# Altium PCB PCB_AltiumDesigner.PcbDoc
Units mm, origin at the board's own origin, x right, y up, seen from the top; angles counter-clockwise.
Board outline 100.7 x 50.7 mm, 2 copper layers (Top Layer, Bottom Layer); 18 components, 17 nets, 66 pads, 14 vias.
Unrouted connection lines stored in the file: 1.
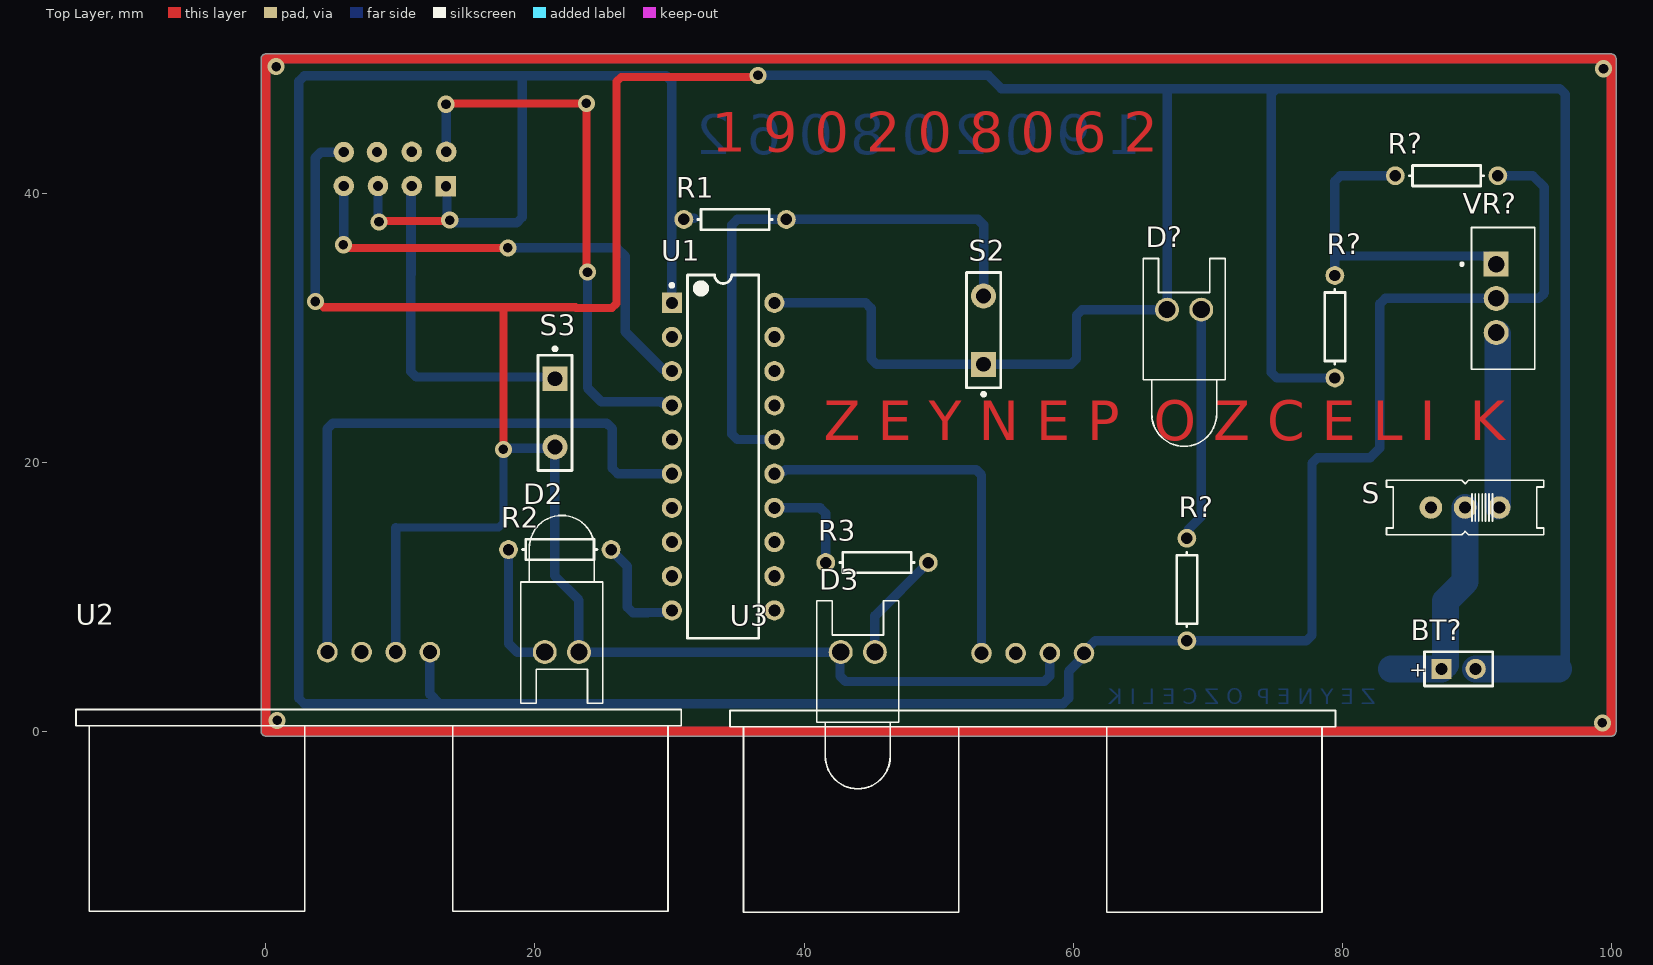
[diagram p0: Top Layer view]
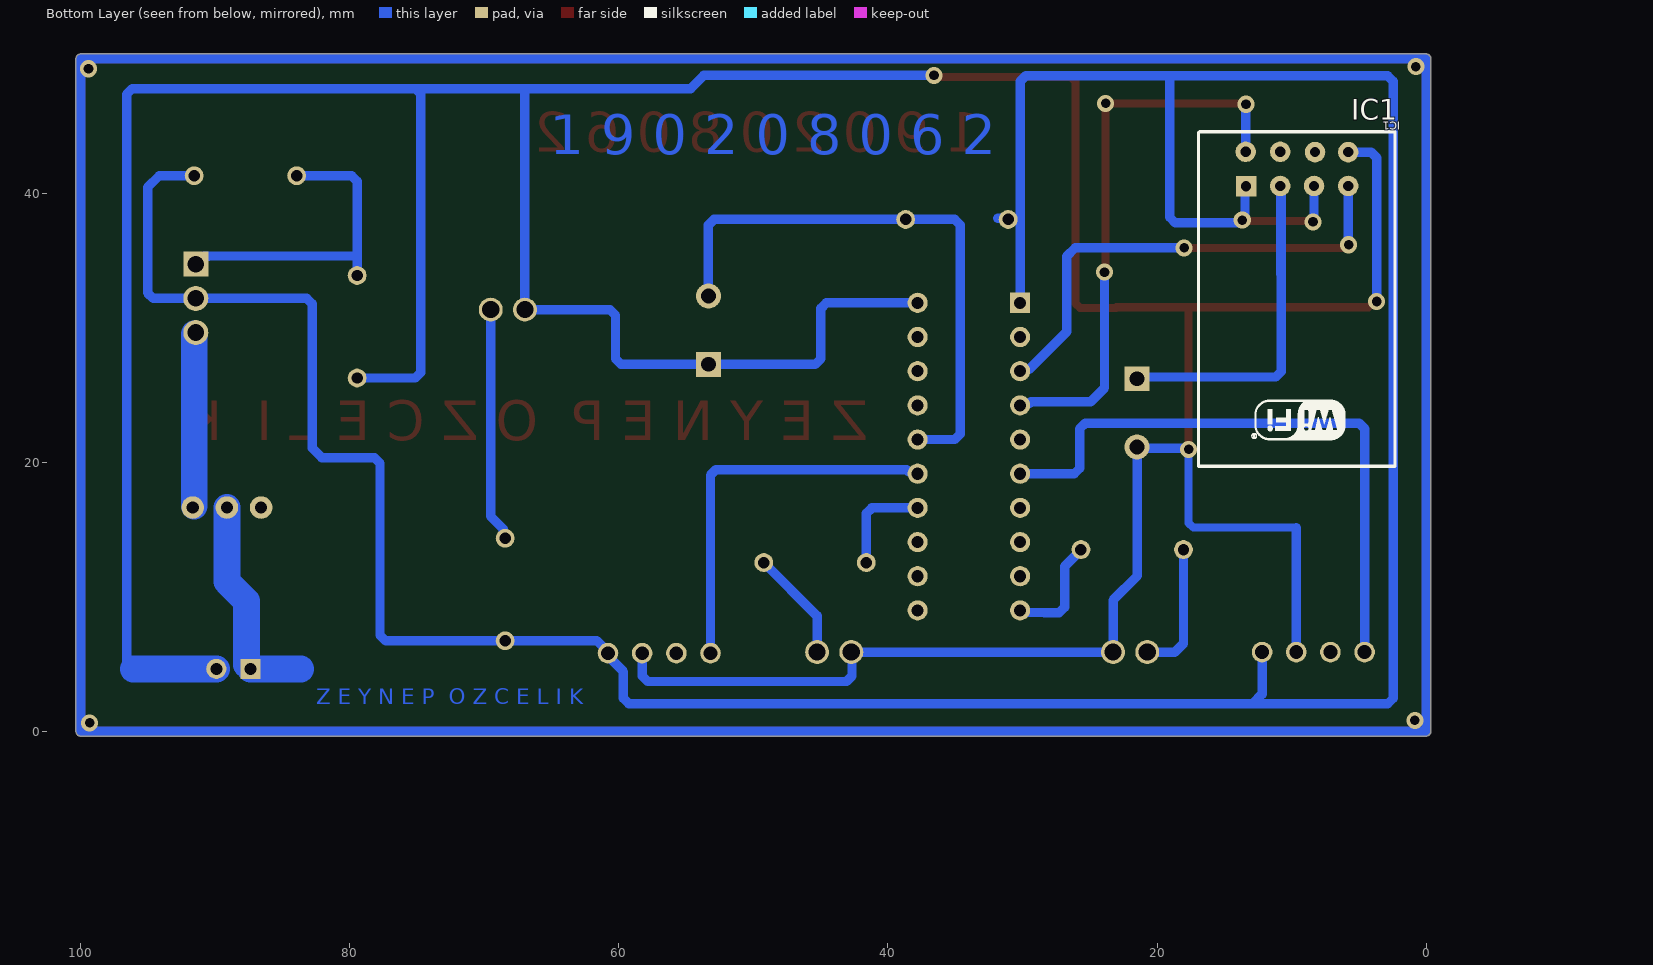
[diagram p1: Bottom Layer view, seen from below]

## Layer stack, top to bottom
Top Solder: solder mask 0.0102, Solder Resist, Dk 3.5
Top Layer: signal copper 0.0356
Dielectric 1: dielectric 0.32, FR-4, Dk 4.8
Bottom Layer: signal copper 0.0356
Bottom Solder: solder mask 0.0102, Solder Resist, Dk 3.5

## Board outline
0,-0.35 cw(c0,0) -0.35,0 -0.35,50 cw(c0,50) 0,50.35 100,50.35 cw(c100,50) 100.35,50 100.35,0 cw(c100,0) 100,-0.35

## Design rules (kind name [scope] priority, off if disabled: settings)
Clearance [All] p1: gap=0.254 ignorepadtopadclearanceinfootprint=FALSE except(0: Arc-Hole Track-Hole SMDPad-Hole THPad-Hole Via-Hole Fill-Hole Poly-Hole Region-Hole Text-Hole)
PolygonConnect [All] p1: connectstyle=Relief reliefconductorwidth=0.254 reliefentries=4 polygonreliefangle="90 Angle" airgapwidth=0.254
RoutingVias [All] p1: holewidth=0.711 width=1.27 viastyle="Through Hole" minholewidth=0.711 minwidth=1.27 maxholewidth=0.711 maxwidth=1.27
SolderMaskExpansion [All] p1: expansion=0.102 istentingtop=FALSE
Width [All] p1: maxlimit=6 minlimit=0.254 preferedwidth=0.7 toplayer_prefwidth=0.6 bottomlayer_minwidth=0.6 bottomlayer_maxwidth=0.7 minimp=50.000000 maximp=50.000000 favimp=50.000000
30 further rules are at their usual default settings.

## Classes and differential pairs
component class Schematic_AltiumDesigner: BT? D2 D3 D? IC1 R1 R2 R3 R? S S2 S3 U1 U2 VR?

## Components (designator, comment, footprint, x,y, rotation, side; value= is the part's Value field where it differs from the comment)
BT? "Battery" BAT-2 88.646,4.648 r0 top
D2 "LED0" LED-0 21.996,5.893 r180 top
D3 "LED0" LED-0 43.993,5.893 r0 top
D? "LED0" LED-0 68.25,31.344 r0 top
IC1 "ESP8266 ESP-11" "ESP8266 ESP-01" 2.31,44.602 r0 bottom
R1 "Res1" AXIAL-0.3 34.874,38.049 r180 top value=47k
R2 "Res1" AXIAL-0.3 21.844,13.513 r0 top value=2.2K
R3 "Res1" AXIAL-0.3 45.415,12.548 r180 top value=2.2K
R? "Res1" AXIAL-0.3 68.453,10.541 r90 top value=1K
R? "220" AXIAL-0.3 87.757,41.3 r0 top value=1K
R? "Res1" AXIAL-0.3 79.451,30.074 r270 top value=390
S "EG1218" EG1218 89.129,16.637 r180 top
S2 "SW-PB" SPST-2 53.34,29.82 r90 top
S3 "SW-PB" SPST-2 21.488,23.673 r270 top
U1 "MSP430G2533IN20" TI-N20 33.985,20.422 r0 top
U2 "LDR" XCVR_HC-SR04 8.382,5.893 r0 top
U3 "LDR" XCVR_HC-SR04 56.998,5.817 r0 top (schematic designator U2)
VR? "LM317T" TO254P1054X470X1955-3 91.44,32.182 r270 top

## Footprints (in the part's own frame and the unit in brackets; to place one, negate y for a bottom-side part, rotate by r counter-clockwise, add the part's x,y. Pads: shape width x height; smd on the part's side, far side on the other; paste and mask are expansions set on the pad)
AXIAL-0.3 [mm] "Axial Device, Thru-Hole; 2 Leads; 0.3 in Pin Spacing"
  round 1.4 hole 0.85: 1(-3.81,0) 2(3.81,0)
  silkscreen extent -2.77,-0.76 2.77,0.76
BAT-2 [mm] "Battery; 2 Leads"
  rect 1.5x1.5 hole 0.9: 1(-1.27,0)
  round 1.5 hole 0.9: 2(1.27,0)
  silkscreen extent -2.54,-1.27 2.54,1.27
EG1218 [mil]
  round 66 hole 35.43: O(-100,0) P(0,0) S(100,0)
  silkscreen extent -230,-80 230,80
"ESP8266 ESP-01" [mil] "ESP8266 ESP-01"
  rect 60x60 hole 30: 1(436,161)
  round 60 hole 30: 2(437,60) 3(336,160) 4(336,60) 5(237,160) 6(234,61) 7(137,160) 8(137,61)
  silkscreen extent 0,1 575,980, body extent 1,2 572,978, height 231
LED-0 [mil] "LED; 2 Leads"
  round 70 hole 50: 1(50,0) 2(-50,0)
  silkscreen extent -120,-400 120,150
SPST-2 [mm] "Switch; 2 Leads"
  rect 1.85x1.85 hole 1.1: 1(-2.54,0)
  round 1.85 hole 1.1: 2(2.54,0)
  silkscreen extent -4.89,-1.27 4.28,1.27
TI-N20 [mm] "DIP, 20-Leads, Body 25.4x6.35 mm, Pitch 2.54 mm"
  rect 1.5x1.5 hole 0.9: 1(-3.81,11.43)
  round 1.5 hole 0.9: 2(-3.81,8.89) 3(-3.81,6.35) 4(-3.81,3.81) 5(-3.81,1.27) 6(-3.81,-1.27) 7(-3.81,-3.81) 8(-3.81,-6.35) 9(-3.81,-8.89) 10(-3.81,-11.43) 11(3.81,-11.43) 12(3.81,-8.89) 13(3.81,-6.35) 14(3.81,-3.81) 15(3.81,-1.27) 16(3.81,1.27) 17(3.81,3.81) 18(3.81,6.35) 19(3.81,8.89) 20(3.81,11.43)
  silkscreen extent -3.93,-13.5 2.65,13.5, body extent -3.95,-13.45 3.95,13.45, height 5.08
TO254P1054X470X1955-3 [mm]
  rect 1.86x1.86 hole 1.24: 1(-2.54,0)
  round 1.86 hole 1.24: 2(0,0) 3(2.54,0)
  silkscreen extent -5.27,-2.64 5.27,2.86
XCVR_HC-SR04 [mm]
  round 1.53 hole 1.02: 1(-3.81,0) 2(-1.27,0) 3(1.27,0) 4(3.81,0)
  silkscreen extent -22.5,-19.27 22.5,-4.27

## Part data
BT?: "Multicell Battery", LatestRevisionDate=17-Jul-2002, LatestRevisionNote="Re-released for DXP Platform.", PackageDescription="Battery; 2 Leads", PackageReference=BAT-2, Published=24-Mar-1999, Publisher="Altium Limited"
D2 D3 D?: "Typical INFRARED GaAs LED", LatestRevisionDate=08-Jul-2005, LatestRevisionNote="Mech Layer 1 removed.", PackageDescription="LED; 2 Leads", PackageReference=LED-0, Published=8-Jun-2000, Publisher="Altium Limited"
R1 R2 R3 R? R?: "Resistor", LatestRevisionDate=17-Jul-2002, LatestRevisionNote="Re-released for DXP Platform.", PackageDescription="Axial Device, Thru-Hole; 2 Leads; 0.3 in Pin Spacing", PackageReference=AXIAL-0.3, Published=8-Jun-2000, Publisher="Altium Limited"
R?: library part Res1, "Resistor", LatestRevisionDate=17-Jul-2002, LatestRevisionNote="Re-released for DXP Platform.", PackageDescription="Axial Device, Thru-Hole; 2 Leads; 0.3 in Pin Spacing", PackageReference=AXIAL-0.3, Published=8-Jun-2000, Publisher="Altium Limited"
S: "æ»‘å‹•é–‹é—œSPDTé€šå­”", Package="Custom package E-Switch", Availability=Unavailable, MF=E-Switch, MP=EG1218, Price=None, SnapEDA_Link=https://www.snapeda.com/parts/EG1218/E-Switch/view-part/13895/?ref=snap
S2 S3: "Switch", LatestRevisionDate=17-Jul-2002, LatestRevisionNote="Re-released for DXP Platform.", PackageDescription="Switch; 2 Leads", PackageReference=SPST-2, Published=24-Mar-1999, Publisher="Altium Limited"
U1: "16 MHz Mixed Signal Microcontroller with 16 KB Flash, 512 B SRAM and 24 GPIOs, -40 to 85 degC, 20-pin DIP (N), Pb-Free (RoHS)", Frequency(MHz)=16, Manufacturer="Texas Instruments", Supplier Part Number 1=MSP430G2513IRHB32T-ND, Temp Sensor=Yes, ADC="10-bit SAR", ADC Channels=8, Brown Out Reset=Yes, Cap touch I/O=Yes, Code_JEDEC=MS-001, ComponentLink1Description="Manufacturer URL", ComponentLink1URL=http://www.ti.com/, ComponentLink2Description=Datasheet, ComponentLink2URL=http://www.ti.com/general/docs/lit/getliterature.tsp?genericPartNumber=MSP430G2533&fileType=pdf, ComponentLink3Description="Package Specification", ComponentLink3URL=http://www.ti.com/litv/pdf/mpds177g, DatasheetVersion=SLAS734D, Eco-Plan="Pb-Free (RoHS)", Flash(KB)=16, GPIO=24, Mounting Technology="Through Hole", PackageDescription="20-Pin Plastic In-Line, Body 25.40 x 6.35 mm, Pitch 2.54 mm", PackageReference=N20, PackageVersion=4040049/E, PartNumber=MSP430G2533IN20, SRAM(B)=512, SubFamily="Value Line", Supplier 1=Digi-Key, Supplier 2=Mouser, Supplier Part Number 2=595-P430G2513IRHB32T, Timers - 16-bit=2, USCI_A (UART/LIN/IrDA/SPI)=1, USCI_B (I2C & SPI)=1, Watchdog=Yes
U2 U3: library part HC-SR04
VR?: "1.5-A, 40-V, adjustable linear voltage regulator 3-TO-220", Package="TO-220-3 Texas Instruments", Arrow_Electronics-Purchase-URL=https://snapeda.com/shop?store=Arrow+Electronics&id=2756289, Availability=Unavailable, DigiKey-Purchase-URL=https://snapeda.com/shop?store=DigiKey&id=2756289, MF="Texas Instruments", Mouser-Purchase-URL=https://snapeda.com/shop?store=Mouser&id=2756289, MP=LM317T, Price=None, SnapEDA_Link=https://www.snapeda.com/parts/LM317T/Texas%20Instruments/view-part/2756289/?ref=snap

## Via types
v1: diameter 1.27, hole 0.711, Top Layer to Bottom Layer, 14 vias

## Nets (pads, with @x,y where several pads share a name; then routed paths per layer and width w, separated by ;. In a path a pad name is that pad's centre, name@x,y a point inside that pad or via, vN(x,y) a via of type N, cw(c..) or ccw(c..) an arc to the next point about the centre after c; other vN are vias at no path point)
A: IC1.2 U1.4 | length 42
  Top Layer w0.6: v1(13.386,46.609) 13.456,46.679 v1(23.825,46.679) 23.825,34.214 v1(23.901,34.138)
  Bottom Layer w0.7: v1(13.386,46.609) 13.398,46.597 13.398,43.091 IC1.2 ; v1(23.901,34.138) 23.901,25.531 24.946,24.486 29.365,24.486 29.466,24.385 30.022,24.385 U1.4
B: IC1.7 U1.3 | length 36
  Top Layer w0.6: v1(5.766,36.17) 5.994,35.941 v1(17.983,35.941)
  Bottom Layer w0.7: v1(5.766,36.17) 5.778,36.182 5.778,40.526 IC1.7 ; v1(17.983,35.941) 26.082,35.941 26.721,35.302 26.721,29.693 29.489,26.925 30.022,26.925 U1.3
C: U1.6 U2.1 | length 45.7
  Bottom Layer w0.7: U2.1 4.572,22.501 4.982,22.911 25.326,22.911 25.737,22.501 25.737,19.562 26.147,19.152 U1.6
D: U1.15 U3.1 | length 29.2
  Bottom Layer w0.7: U1.15 37.948,19.305 38.454,19.305 38.605,19.456 52.778,19.456 53.188,19.046 U3.1@53.188,5.553
GND: BT?.2 D2.2 D3.2 D?.2 IC1.8 R?.2@79.451,26.264 S2.1 S3.2 U1.20 U2.3 U3.3 | length 344.4
  Top Layer w0.6: v1(3.677,31.949) 3.859,31.949 4.286,31.521 17.653,31.521 ; IC1.8 IC1.8@5.873,43.136 ; v1(17.653,20.955) 17.653,31.521 ; v1(36.577,48.761) 36.457,48.641 26.412,48.641 26.06,48.29 26.06,31.814 25.709,31.462 23.055,31.462 22.996,31.521 17.653,31.521
  Bottom Layer w0.6: 9.652,15.138 17.302,15.138 17.653,15.49 v1(17.653,20.955)
  Bottom Layer w0.7: v1(3.677,31.949) 3.658,31.969 3.658,42.621 4.089,43.053 IC1.8 ; U2.3 9.652,15.138 ; v1(17.653,20.955) 17.742,21.044 21.399,21.044 S3.2@21.463,21.107 ; S3.2 S3.2@21.463,21.107 ; v1(36.577,48.761) 53.675,48.761 54.658,47.777 66.878,47.777 ; U1.20 44.573,31.852 44.983,31.442 44.983,27.69 45.393,27.28 S2.1 59.839,27.28 60.249,27.69 60.249,30.934 60.659,31.344 D?.2 66.98,47.676 66.878,47.777 ; U3.3 58.256,5.805 58.256,4.118 57.846,3.708 43.082,3.708 42.672,4.118 42.672,5.842 D3.2 D2.2 23.266,9.754 21.463,11.557 S3.2@21.463,21.107 ; R?.2@79.451,26.264 75.137,26.264 74.727,26.674 74.727,47.367 75.137,47.777 ; 96.088,4.648 96.571,5.131 96.571,47.367 96.161,47.777 75.137,47.777 ; 66.878,47.777 75.137,47.777
  Bottom Layer w2: BT?.2 96.088,4.648
NetBT?_1: BT?.1 S.P | length 16.5
  Bottom Layer w0.7: 83.617,4.674 83.642,4.648 ; BT?.1 BT?.1@87.681,4.953
  Bottom Layer w2: 83.642,4.648 BT?.1 ; BT?.1@87.681,4.953 87.681,9.677 89.129,11.125 S.P
NetD2_1: D2.1 R2.1 | length 9.9
  Bottom Layer w0.7: R2.1 18.034,6.528 18.669,5.893 D2.1
NetD3_1: D3.1 R3.1 | length 8.3
  Bottom Layer w0.7: D3.1 45.263,8.585 R3.1
NetD?_1: D?.1 R?.2@68.453,14.351 | length 17.4
  Bottom Layer w0.7: R?.2@68.453,14.351 68.587,14.485 68.587,15.044 69.52,15.977 D?.1
NetR1_1: R1.1 S2.2 U1.16 | length 43.2
  Bottom Layer w0.7: U1.16 35.03,21.692 34.62,22.102 34.62,37.639 35.03,38.049 52.93,38.049 53.34,37.639 S2.2
NetR1_2: IC1.1 IC1.5 R1.2 R?.1@68.453,6.731 R?.2@91.567,41.3 U1.1 U2.4 U3.4 VR?.2 | length 255.6
  Top Layer w0.6: v1(8.407,37.871) 8.472,37.936 13.603,37.936 v1(13.667,38)
  Bottom Layer w0.7: v1@8.33,37.668 IC1.5 ; U2.4 12.192,2.769 12.903,2.057 ; IC1.1 13.462,40.436 13.462,38.205 v1(13.667,38) 13.872,37.795 18.64,37.795 19.05,38.205 19.05,48.717 ; U1.1 30.175,37.973 ; R1.2@31.064,38.125 31.826,38.125 ; R1.2@31.369,38.075 30.277,38.075 30.175,37.973 ; R?.2@91.567,41.3 94.158,41.3 95.021,40.437 95.021,32.592 94.611,32.182 VR?.2 83.197,32.182 82.787,31.772 82.787,21.065 82.066,20.344 78.159,20.344 77.749,19.934 77.749,7.141 77.339,6.731 68.453,6.731 61.633,6.731 60.808,5.906 60.808,5.592 59.658,4.442 59.658,2.467 59.248,2.057 12.903,2.057 ; 12.903,2.057 2.848,2.057 2.438,2.467 2.438,48.307 2.848,48.717 19.05,48.717 ; 19.05,48.717 29.765,48.717 30.175,48.307 30.175,37.973
NetR2_2: R2.2 U1.10 | length 8.3
  Bottom Layer w0.7: R2.2 25.654,13.476 26.873,12.257 26.873,9.224 27.283,8.814 28.381,8.814 28.406,8.839 30.022,8.839 U1.10
NetR3_2: R3.2 U1.14 | length 7.6
  Bottom Layer w0.7: U1.14 41.195,16.612 41.605,16.202 R3.2
NetR?_1: R?.1@79.451,33.884 R?.1@83.947,41.3 VR?.1 | length 23.9
  Bottom Layer w0.7: R?.1@79.451,33.884 79.451,35.331 ; R?.1@83.947,41.3 79.861,41.3 79.451,40.89 79.451,35.331 ; VR?.1 90.86,35.302 90.48,35.302 90.45,35.331 79.451,35.331
NetS3_1: IC1.3 S3.1 | length 24.8
  Top Layer w0.6: 8.254,43.053 8.302,43.101 ; IC1.3@10.773,40.467 IC1.3
  Bottom Layer w0.7: 10.773,34.002 10.77,33.998 10.77,26.75 11.18,26.34 21.361,26.34 S3.1
  Bottom Layer w0.75: 10.773,34.002 IC1.3@10.773,40.467
NetS_O: S.O VR?.3 | length 13.1
  Bottom Layer w0.7: VR?.3 VR?.3@91.554,29.527 ; S.O@91.554,16.751 S.O
  Bottom Layer w2: S.O@91.554,16.751 VR?.3@91.554,29.527
V: 
pads on no net: IC1.4 IC1.6 S.S U1.2 U1.5 U1.7 U1.8 U1.9 U1.11 U1.12 U1.13 U1.17 U1.18 U1.19 U2.2 U3.2
copper on no net:
  other v1: 99.339,0.635 0.838,0.813 99.416,49.251 0.762,49.403

## Other copper
Top Layer:
  text "1 9 0 2 0 8 0 6 2" at 33.147,42.123 h5
  text "Z E Y N E P  O Z C E L I  K" at 41.453,20.685 h5
Bottom Layer:
  text "1 9 0 2 0 8 0 6 2" at 65.126,41.945 h5
  text "Z E Y N E P  O Z C E L I K" at 82.499,1.624 h2
Multi-Layer:
  lines w0.7: 0,0 0,50 100,50 100,0 0,0

## Text inside footprints (layer, text, board x,y; h text height)
BT?: Top Overlay "+" at 84.976,4.071 h1.15
IC1: Mechanical 13 "ANTENNA AREA" at 2.565,20.254 h0.25 r180; Mechanical 13 "CUTOUT POLYGON" at 2.565,20.762 h0.25 r180